# Altium PCB smart-clock-display.PcbDoc
Units mm, origin at the board's own origin, x right, y up, seen from the top; angles counter-clockwise.
Board outline 100 x 50 mm, 4 copper layers (Top Layer, Int1 (GND), Int2 (PWR), Bottom Layer), stack 1.369 mm thick; 19 components, 42 nets, 124 pads, 0 vias.
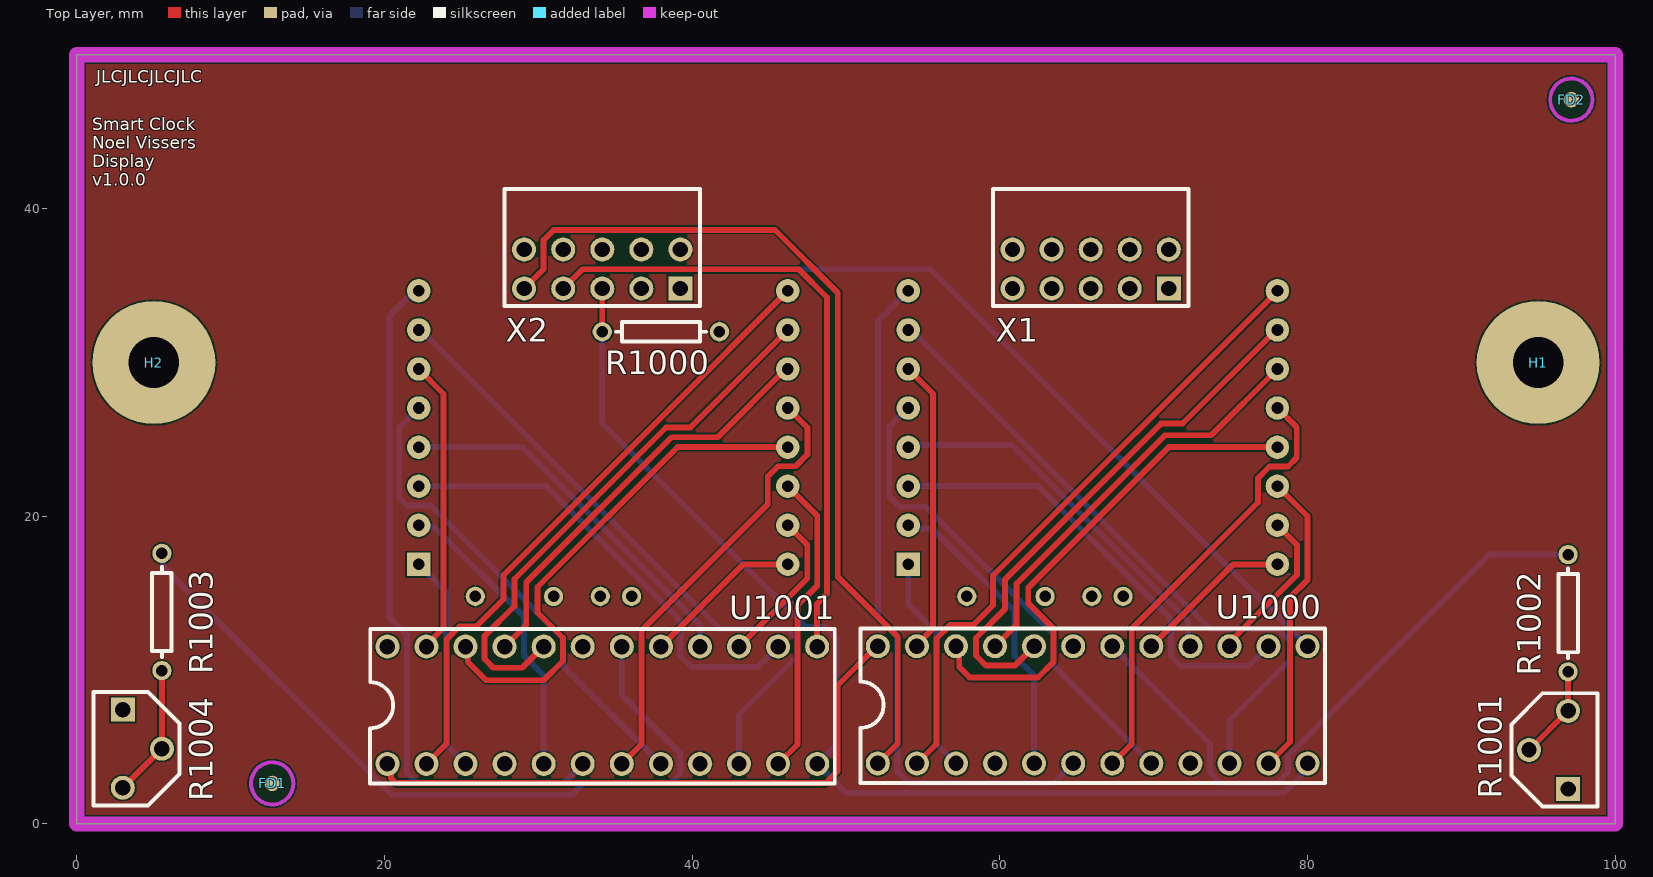
[diagram p0: Top Layer view]
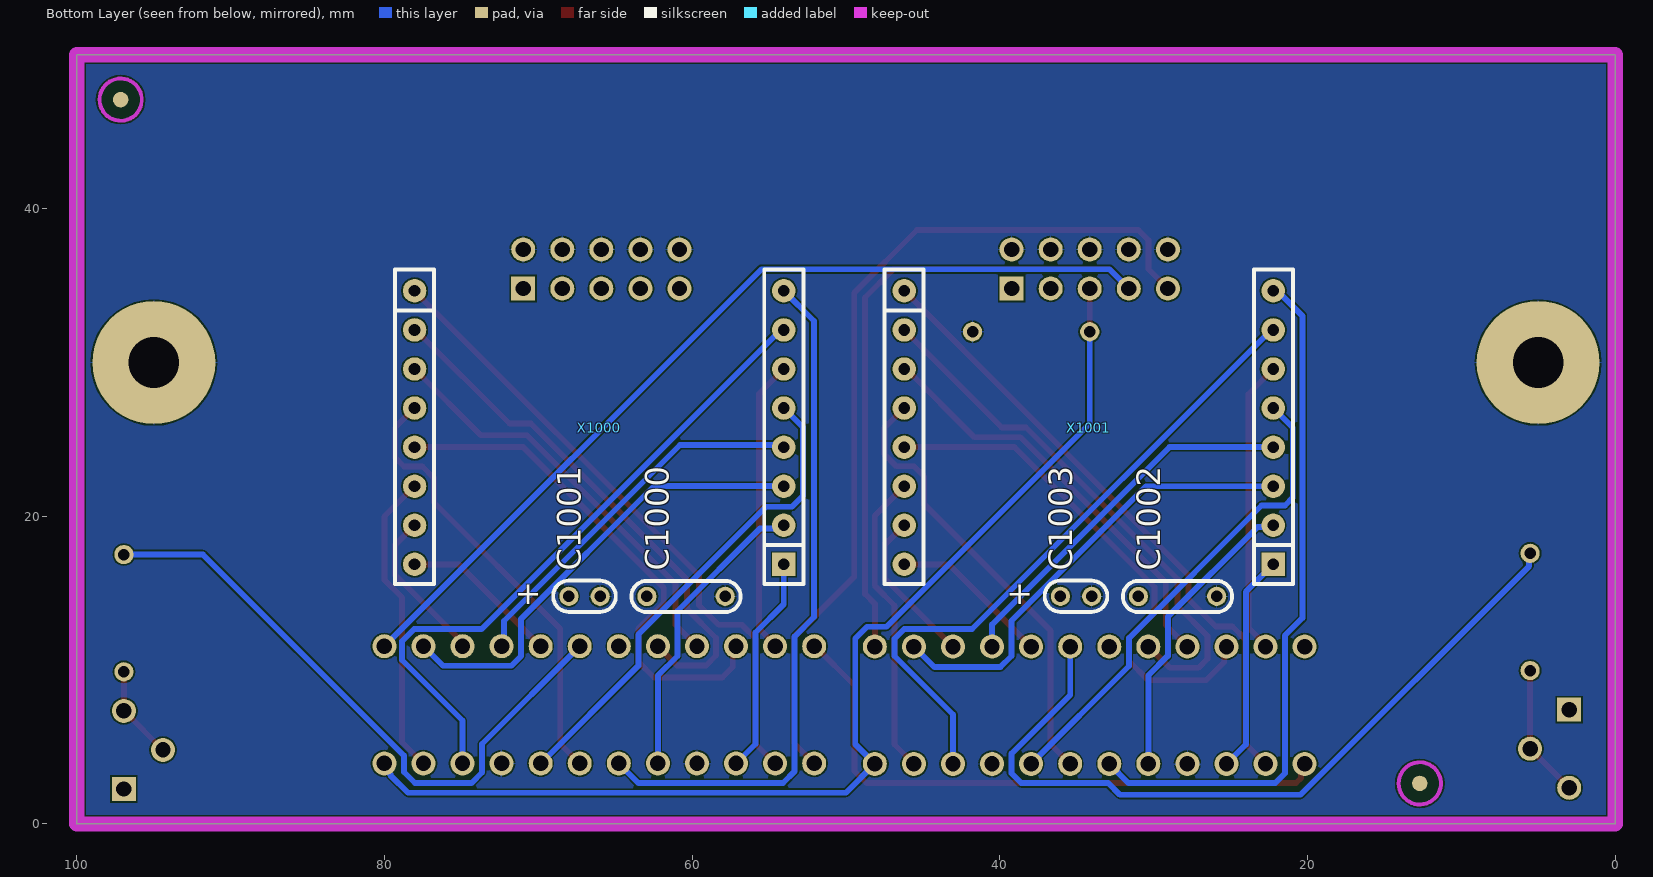
[diagram p1: Bottom Layer view, seen from below]
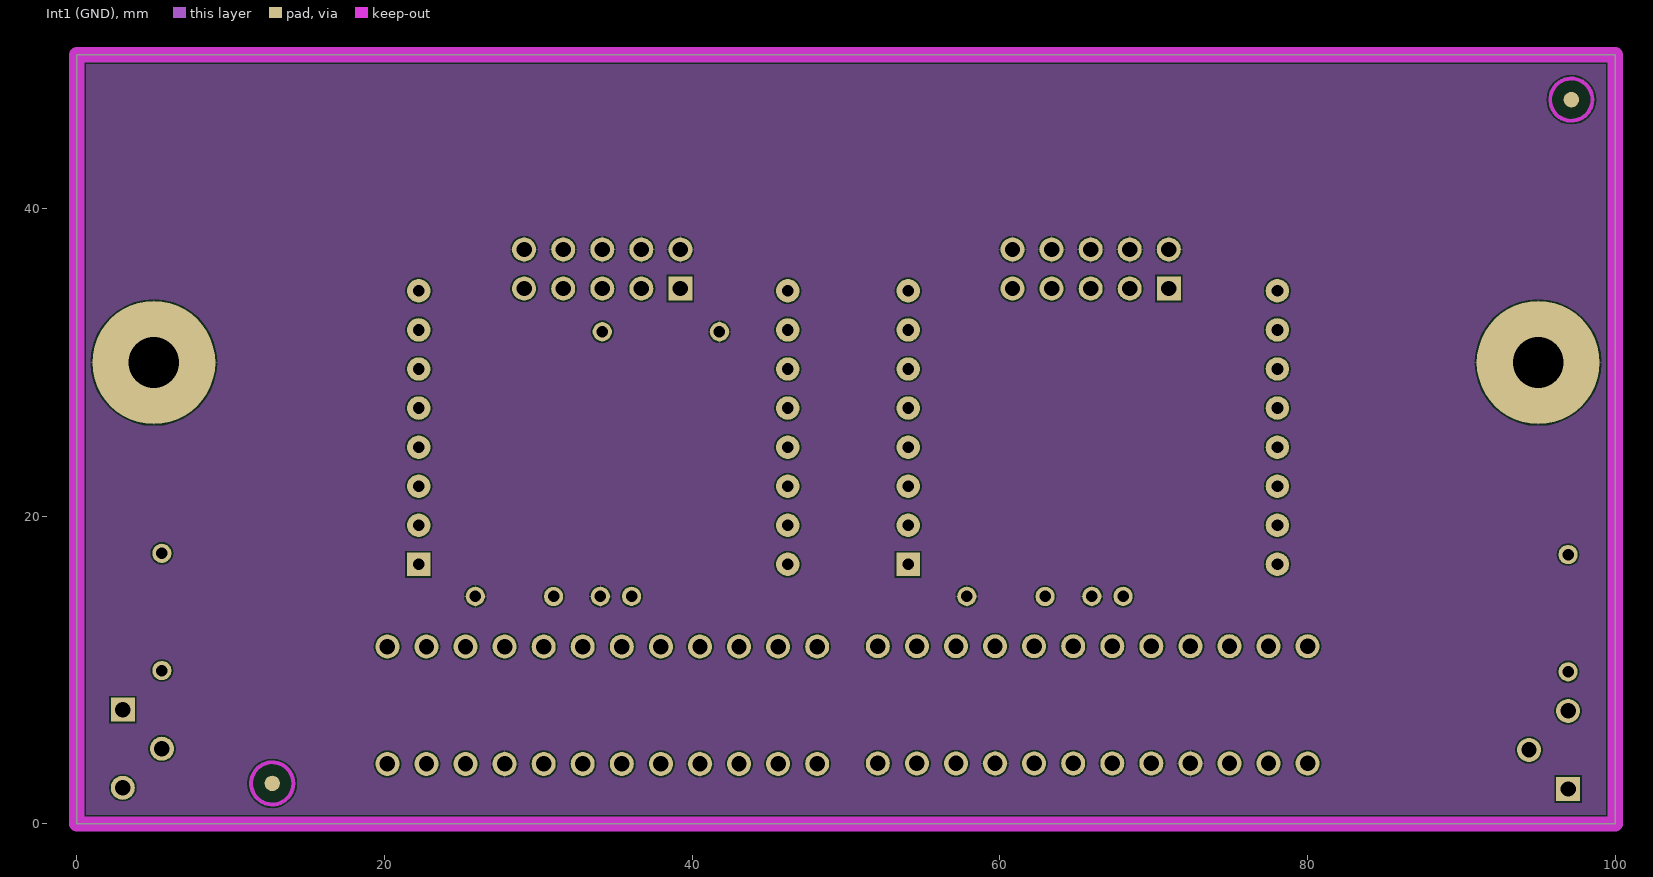
[diagram p2: Int1 (GND)]
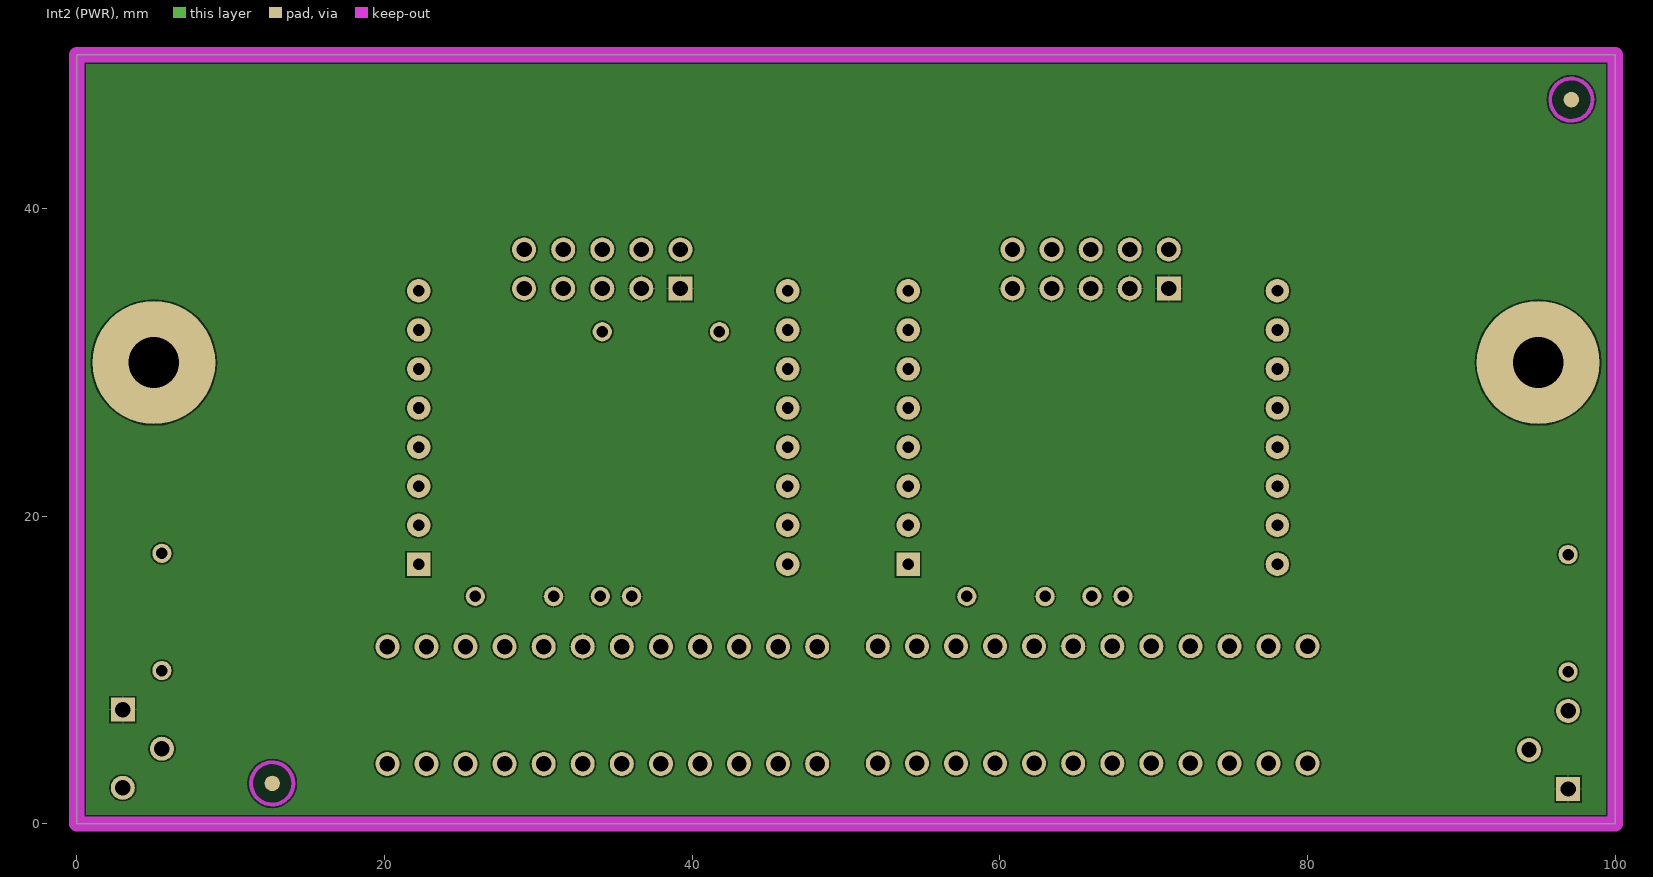
[diagram p3: Int2 (PWR)]
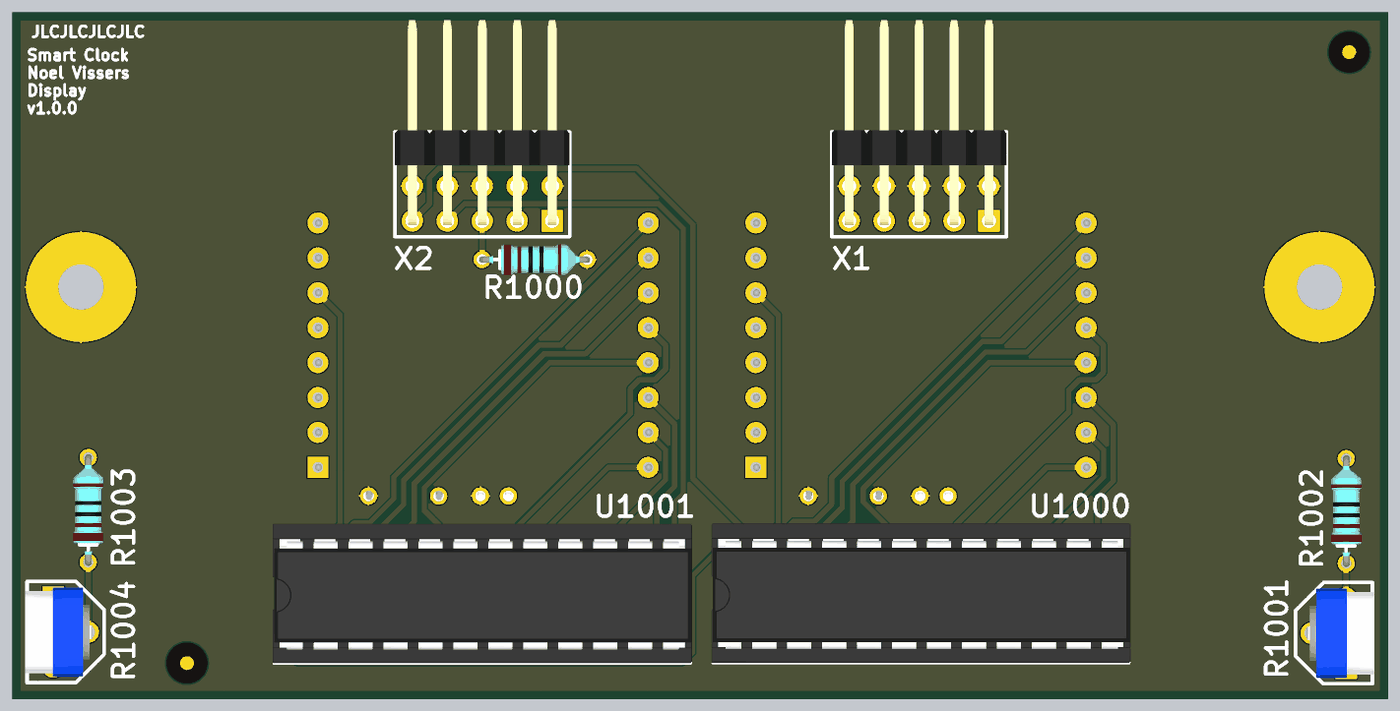
[diagram p4: 3D render of the assembled board from above, using the file's embedded part models]
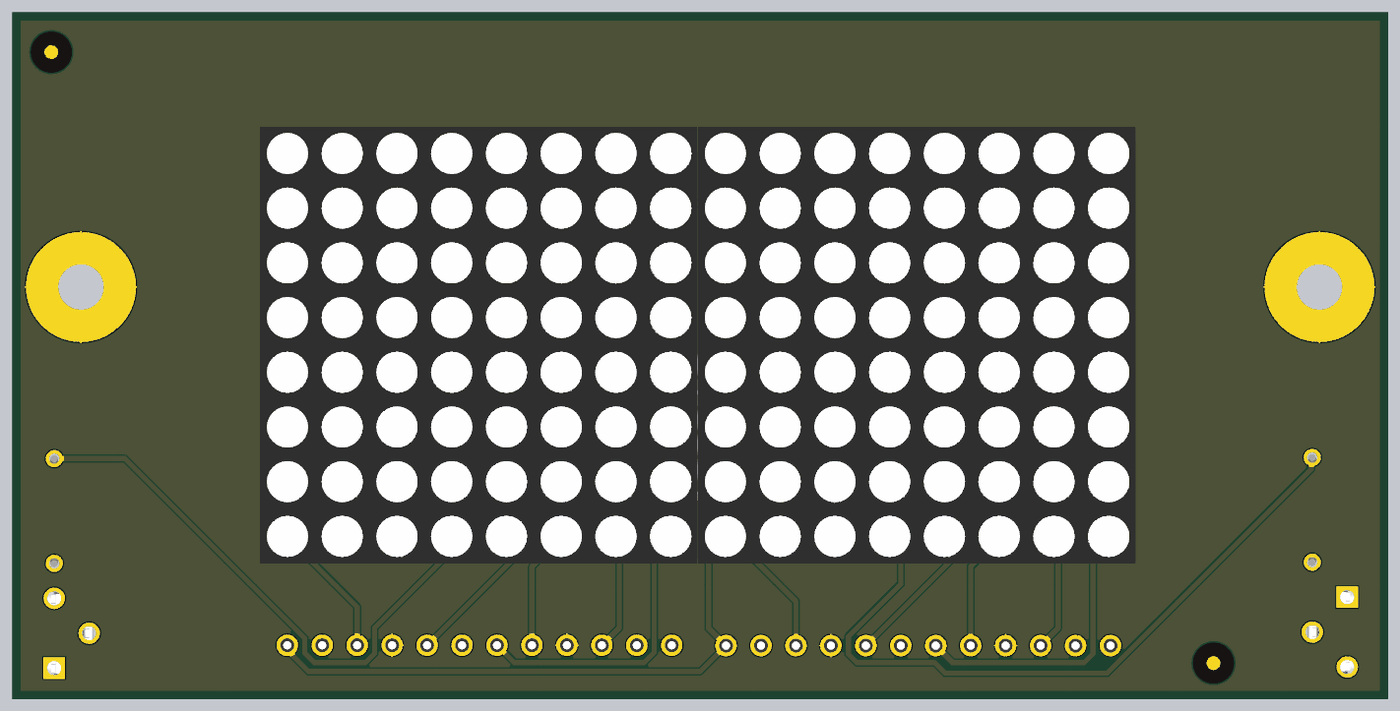
[diagram p5: 3D render of the assembled board from below, using the file's embedded part models]

## Layer stack, top to bottom
Top Solder: solder mask 0.0254, SM-001, Dk 4
Top Layer: signal copper 0.035
Dielectric 1: prepreg 0.1295, PP-017, Dk 4.3
Dielectric 2: prepreg 0.1295, PP-017, Dk 4.3
Int1 (GND): signal copper 0.035
Dielectric 3: core 0.7112, Core-039, Dk 4.8
Int2 (PWR): signal copper 0.035
Dielectric 4: prepreg 0.1295, PP-017, Dk 4.3
Dielectric 5: prepreg 0.1295, PP-017, Dk 4.3
Bottom Layer: signal copper 0.035
Bottom Solder: solder mask 0.0254, SM-001, Dk 4

## Board outline
0,50 100,50 100,0 0,0

## Design rules (kind name [scope] priority, off if disabled: settings)
BoardOutlineClearance [All] p1: gap=0.2 ignorepadtopadclearanceinfootprint=FALSE
Clearance [All] p1: gap=0.102 ignorepadtopadclearanceinfootprint=FALSE except(0.127: Arc-Via Track-Via SMDPad-Via THPad-Via Via-Via Via-Fill Via-Poly Via-Region Via-Text; 0.25: Arc-Hole Track-Hole SMDPad-Hole THPad-Hole Via-Hole Fill-Hole Poly-Hole Region-Hole Text-Hole)
ComponentClearance [All] p1: gap=0.01 collisioncheckmode=3 verticalgap=0.01 showdistances=TRUE
DiffPairsRouting [All] p1: maxlimit=0.102 minlimit=0.102 mostfreqgap=0.102 toplayer_minwidth=0.102 toplayer_maxwidth=1816.048 toplayer_prefwidth=0.102 midlayer1_minwidth=0.102 midlayer1_maxwidth=1816.048 midlayer1_prefwidth=0.102 midlayer2_minwidth=0.102 midlayer2_maxwidth=1816.048 midlayer2_prefwidth=0.102 bottomlayer_minwidth=0.102 bottomlayer_maxwidth=1816.048 bottomlayer_prefwidth=0.102 maxuncoupledlength=12.7
Height [All] p1: minheight=0 maxheight=1816.048 prefheight=12.7
HoleSize [All] p1: absolutevalues=TRUE maxlimit=6.3 minlimit=0.2 maxpercent=80.000 minpercent=20.000
HoleToHoleClearance [All] p1: gap=0.25 allowstackedmicrovias=FALSE
MinimumAnnularRing [All] p1: minimumring=0.076
MinimumSolderMaskSliver [All] p1: minsoldermaskwidth=0
PlaneClearance [All] p1: clearance=0.102
PlaneConnect PlaneConnectPowerPads [InPadClass('PowerPads')] p1: planeconnectstyle=Direct reliefexpansion=0.508 reliefentries=4 reliefconductorwidth=0.254 reliefairgap=0.254
PlaneConnect [All] p2: pad.planeconnectstyle=Relief pad.reliefexpansion=0.3 pad.reliefentries=4 pad.reliefconductorwidth=0.102 pad.reliefairgap=0.102 via.planeconnectstyle=Direct via.reliefexpansion=0.3 via.reliefentries=4 via.reliefconductorwidth=0.127 via.reliefairgap=0.127
PolygonConnect PolygonConnectPowerPads [All vs (InPadClass('PowerPads'))] p1: connectstyle=Direct reliefconductorwidth=0.254 reliefentries=4 polygonreliefangle="90 Angle" airgapwidth=0.254
PolygonConnect [All] p2: thpad.connectstyle=Relief thpad.reliefconductorwidth=0.102 thpad.reliefentries=4 thpad.polygonreliefangle="90 Angle" thpad.airgapwidth=0.102 smdpad.connectstyle=Relief smdpad.reliefconductorwidth=0.102 smdpad.reliefentries=4 smdpad.polygonreliefangle="90 Angle" smdpad.airgapwidth=0.102 via.connectstyle=Direct via.reliefconductorwidth=0.127 via.reliefentries=4 via.polygonreliefangle="90 Angle" via.airgapwidth=0.127
RoutingVias [All] p1: holewidth=0.2 width=0.45 viastyle="Through Hole" minholewidth=0.2 minwidth=0.45 maxholewidth=6.3 maxwidth=6.55
SilkToSilkClearance [All] p1: silktosilkclearance=0
SilkToSolderMaskClearance [IsPad] p1: minsilkscreentomaskgap=0.102 clearancetoexposedcopper=TRUE
SolderMaskExpansion [All] p1: expansion=0.075 istentingtop=FALSE
Width [All] p1: maxlimit=1816.048 minlimit=0.102 preferedwidth=0.102
20 further rules are at their usual default settings.

## Components (designator, comment, footprint, x,y, rotation, side; value= is the part's Value field where it differs from the comment)
C1000 "0.1uF" "TH-CAPACITOR - ANGLE" 62.933,14.8 r180 bottom
C1001 "10uF" "TH-CAPACITOR - POL - ANGLE" 65.727,14.8 r0 bottom
C1002 "0.1uF" "TH-CAPACITOR - ANGLE" 30.98,14.8 r180 bottom
C1003 "10uF" "TH-CAPACITOR - POL - ANGLE" 33.774,14.8 r0 bottom
FD1 "FD" FD 12.7,2.64 r0 top
FD2 "FD" FD 97.155,47.09 r0 top
H1 "SIZE" HOLE#1 95,28.04 r0 top
H2 "SIZE" HOLE#2 5,29 r0 top
R1000 "10k" "AXIAL RESISTOR" 34.155,32 r0 top
R1001 "100k" POTENTIOMETER 96.943,2.275 r90 top
R1002 "10k" "AXIAL RESISTOR" 96.943,9.895 r90 top
R1003 "10k" "AXIAL RESISTOR" 5.525,9.975 r90 top
R1004 "100k" POTENTIOMETER 2.985,7.435 r270 top
U1000 "MAX7219" "DIP-24 WITH SOCKET" 66.04,7.747 r0 top
U1001 "MAX7219" "DIP-24 WITH SOCKET" 34.155,7.72 r0 top
X1 "HEADER-2x5" HEADER-2x5-MALE 60.825,37.35 r0 top
X2 "HEADER-2x5" HEADER-2x5-MALE 29.075,37.35 r0 top
X1000 "1088AS" 1088AS-DOT-MATRIX-8x8 81.983,9.768 r180 bottom
X1001 "1088AS" 1088AS-DOT-MATRIX-8x8 50.157,9.768 r180 bottom

## Footprints (in the part's own frame and the unit in brackets; to place one, negate y for a bottom-side part, rotate by r counter-clockwise, add the part's x,y. Pads: shape width x height; smd on the part's side, far side on the other; paste and mask are expansions set on the pad)
1088AS-DOT-MATRIX-8x8 [mil] "8x8 DOT MATRIX DISPLAY"
  rect 60x60 hole 30: 1(1100,280)
  round 60 hole 30: 2(1100,380) 3(1100,480) 4(1100,580) 5(1100,680) 6(1100,780) 7(1100,880) 8(1100,980) 9(155,980) 10(155,880) 11(155,780) 12(155,680) 13(155,580) 14(155,480) 15(155,380) 16(155,280)
  silkscreen extent 105,230 1150,1035, body extent 0,4 1252,1256, height 397
"AXIAL RESISTOR" [mm] "STANDARD AXIAL RESISTOR"
  round 1.25 hole 0.75: 1(0,0) 2(7.62,0)
  silkscreen extent 0.89,-0.64 6.73,0.64, body extent -0.26,-1.11 7.86,1.09, height 2.28
"DIP-24 WITH SOCKET" [mm] "DIP-24 PACKAGE WITH SOCKET"
  round 1.56 hole 1: 1(-13.97,-3.81) 2(-11.43,-3.81) 3(-8.89,-3.81) 4(-6.35,-3.81) 5(-3.81,-3.81) 6(-1.27,-3.81) 7(1.27,-3.81) 8(3.81,-3.81) 9(6.35,-3.81) 10(8.89,-3.81) 11(11.43,-3.81) 12(13.97,-3.81) 13(13.97,3.81) 14(11.43,3.81) 15(8.89,3.81) 16(6.35,3.81) 17(3.81,3.81) 18(1.27,3.81) 19(-1.27,3.81) 20(-3.81,3.81) 21(-6.35,3.81) 22(-8.89,3.81) 23(-11.43,3.81) 24(-13.97,3.81)
  silkscreen extent -15.1,-5.08 15.11,4.95, body extent -15.24,-5.08 15.24,5.08, height 9.13
FD [mm] "FIDUCIAL MARKER"
  round 1 all layers, no hole mask+1: 1(0,0)
  Keep-Out Layer circle w0.254: c0,0 r1.373
HEADER-2x5-MALE [mm] "2.54mm MALE HEADER - 2x5"
  rect 1.56x1.56 hole 1: 1(10.16,-2.54)
  round 1.56 hole 1: 2(10.16,0) 3(7.62,-2.54) 4(7.62,0) 5(5.08,-2.54) 6(5.08,0) 7(2.54,-2.54) 8(2.54,0) 9(0,-2.54) 10(0,0)
  silkscreen extent -1.27,-3.68 11.43,3.94, body extent -1.27,-2.84 11.44,12.06, height 5.04
HOLE#1 [mm] "M3 SCREW HOLE"
  round 8 hole 3.3: 1(0,1.96)
HOLE#2 [mm] "M3 SCREW HOLE"
  round 8 hole 3.3: 1(0,1)
POTENTIOMETER [mm] "POTENTIOMETER"
  rect 1.56x1.56 hole 1: 1(0,0)
  round 1.56 hole 1: 2(2.54,2.54) 3(5.08,0)
  silkscreen extent -1.14,-1.91 6.22,3.68, body extent -0.71,-2.03 5.79,2.84, height 8.34
"TH-CAPACITOR - ANGLE" [mm] "TH-CAPACITOR - ANGLE"
  round 1.25 hole 0.75: 1(-0.009,-0.008) 2(5.08,0)
  silkscreen extent -1.02,-1.02 6.08,1.01, body extent -0.76,-0.32 5.73,6.67, height 2.64
"TH-CAPACITOR - POL - ANGLE" [mm] "TH-CAPACITOR - POL - ANGLE"
  round 1.25 hole 0.75: 1(0.254,0) 2(2.286,0)
  silkscreen extent -0.76,-1.03 3.31,1.01, body extent -1.23,-8.4 3.77,0.25, height 5.09

## Part data
C1000 C1002: library part CAPACITOR, "GENERIC CAPACITOR"
C1001 C1003: library part "CAPACITOR POL", "POLARIZED CAPACITOR"
FD1 FD2: "FIDUCIAL MARKER"
H1 H2: library part MOUNTING-HOLE, "M3 MOUNTING HOLE WITH SCREW AND SPACER"
R1000 R1002 R1003: library part RESISTOR, "GENERIC RESISTOR"
R1001 R1004: library part POTMETER, "POTMETER"
U1000 U1001: "IC DRVR 7 SEGMNT 8 DIGIT 24SOIC", Package="DIP-24 Maxim Integrated", Digi-Key_Part_Number=MAX7219CWG+TCT-ND, Digi-Key_Purchase_URL=https://www.digikey.com/product-detail/en/maxim-integrated/MAX7219CWG-T/MAX7219CWG-TCT-ND/4146791?utm_source=snapeda&utm_medium=aggregator&utm_campaign=symbol, MF="Maxim Integrated", MP=MAX7219, SnapEDA_Link=https://www.snapeda.com/parts/MAX7219/Maxim%20Integrated/view-part/481049/?ref=snap
X1 X2: "2.54mm HEADER 2x5", System=Connector
X1000 X1001: library part 1088AS-DOT-MATRIX, "8x8 DOT MATRIX LED DISPLAY"

## Nets (pads, with @x,y where several pads share a name; then routed paths per layer and width w, separated by ;. In a path a pad name is that pad's centre, name@x,y a point inside that pad or via, vN(x,y) a via of type N, cw(c..) or ccw(c..) an arc to the next point about the centre after c; other vN are vias at no path point)
5V_VCC: C1000.1 C1001.2 C1002.1 C1003.2 R1001.1 R1004.1 U1000.19 U1001.19 X1.1 X1.3 X1.5 X1.7 X1.9 X2.1 X2.3 | length 0.3
  Bottom Layer w0.254: X1.3@68.204,34.569 X1.3
CS: R1000.1 U1000.12 U1001.12 X2.5 | length 72.2
  Top Layer w0.381: R1000.1 X2.5
  Bottom Layer w0.381: R1000.1@34.155,32.011 34.155,26.043 47.371,12.827 48.641,12.827 49.403,12.065 49.403,5.188 U1001.12 50.003,2.032 78.48,2.032 79.623,3.175 79.623,3.231 80.01,3.618 U1000.12
DATA_OUT: U1000.24 U1001.1 | length 39.7
  Top Layer w0.381: U1001.1 20.411,3.684 20.411,2.997 20.741,2.667 48.67,2.667 49.441,3.438 49.441,8.997 52.001,11.557 U1000.24
GND: C1000.2 C1001.1 C1002.2 C1003.1 H1.1 H2.1 R1000.2 U1000.4 U1000.9 U1001.4 U1001.9 X1.2 X1.4 X1.6 X1.8 X1.10 X2.2 X2.4 X2.6 X2.8 X2.10
MOSI: U1000.1 X2.9 | length 57.7
  Top Layer w0.381: X2.9 30.328,36.063 30.328,37.955 30.994,38.622 45.378,38.622 49.466,34.534 49.466,16.066 53.365,12.167 53.365,5.232 U1000.1 ; U1000.1@52.57,3.91 U1000.1@52.57,4.118
NetR1001_2: R1001.2 R1001.3 R1002.1 | length 6.1
  Top Layer w0.381: R1001.2 R1001.3 R1002.1
NetR1002_2: R1002.2 U1000.18 | length 41.2
  Bottom Layer w0.381: U1000.18 73.66,5.207 73.66,3.346 74.339,2.667 78.021,2.667 78.74,3.386 78.74,4.445 91.81,17.515 R1002.2
NetR1003_1: R1003.1 R1004.2 R1004.3 | length 8.7
  Top Layer w0.381: R1004.3 R1004.2 R1003.1
NetR1003_2: R1003.2 U1001.18 | length 51.1
  Bottom Layer w0.381: R1003.2 5.588,17.532 5.588,16.764 20.447,1.905 32.194,1.905 32.956,2.667 38.608,2.667 39.243,3.302 39.243,4.572 35.425,8.39 U1001.18
NetU1000_2: U1000.2 X1000.9 | length 41.3
  Top Layer w0.381: U1000.2 55.88,5.207 55.88,12.065 56.769,12.954 58.293,12.954 59.563,14.224 59.563,16.153 78.046,34.636 X1000.9
NetU1000_3: U1000.3 X1000.1 | length 14.2
  Bottom Layer w0.381: X1000.1 54.043,14.283 55.88,12.446 55.88,5.207 U1000.3
NetU1000_5: U1000.5 X1000.2 | length 19.7
  Bottom Layer w0.381: X1000.2 54.262,19.201 55.602,19.201 60.96,13.843 60.96,10.922 62.23,9.652 U1000.5
NetU1000_6: U1000.6 X1000.8 | length 44.8
  Bottom Layer w0.381: X1000.8 52.08,32.697 52.08,13.452 53.34,12.192 53.34,3.429 54.102,2.667 63.5,2.667 U1000.6
NetU1000_7: U1000.7 X1000.12 | length 29.3
  Top Layer w0.381: U1000.7 68.58,5.207 68.58,12.7 76.778,20.898 76.778,22.486 77.533,23.241 78.74,23.241 79.3,23.801 79.3,25.787 X1000.12
NetU1000_8: U1000.8 X1000.5 | length 31.7
  Bottom Layer w0.381: X1000.5 52.802,25.799 52.802,21.335 53.515,20.622 55.197,20.622 63.5,12.319 63.5,10.287 U1000.8
NetU1000_10: U1000.10 X1000.7 | length 42.8
  Bottom Layer w0.381: X1000.7 54.246,32.12 73.686,12.68 78.068,12.68 78.867,11.881 78.867,10.668 74.93,6.731 U1000.10
NetU1000_11: U1000.11 X1000.14 | length 19.9
  Top Layer w0.381: U1000.11 78.867,5.334 78.867,14.732 80.01,15.875 80.01,19.996 X1000.14
NetU1000_14: U1000.14 X1000.3 | length 30.2
  Bottom Layer w0.381: X1000.3 54.054,21.971 62.484,21.971 71.12,13.335 71.12,10.922 71.75,10.292 76.205,10.292 U1000.14
NetU1000_15: U1000.15 X1000.15 | length 10.2
  Top Layer w0.381: U1000.15 74.93,11.811 79.311,16.192 79.311,18.156 X1000.15
NetU1000_16: U1000.16 X1000.4 | length 24.7
  Bottom Layer w0.381: X1000.4 54.181,24.638 60.785,24.638 72.229,13.194 72.229,11.718 U1000.16
NetU1000_17: U1000.17 X1000.16 | length 10.4
  Top Layer w0.381: U1000.17 75.173,16.88 X1000.16
NetU1000_20: U1000.20 X1000.10 | length 34.7
  Top Layer w0.381: U1000.20 60.969,10.296 59.099,10.296 58.445,10.95 58.445,12.09 60.325,13.97 60.325,15.875 70.485,26.035 71.882,26.035 77.967,32.12 X1000.10
NetU1000_21: U1000.21 X1000.11 | length 27.4
  Top Layer w0.381: U1000.21 61.087,12.954 61.087,15.621 70.739,25.273 73.739,25.273 X1000.11
NetU1000_22: U1000.22 X1000.13 | length 33.8
  Top Layer w0.381: U1000.22 57.359,11.348 57.359,10.205 58.039,9.525 62.484,9.525 63.5,10.541 63.5,12.7 61.849,14.351 61.849,15.367 70.982,24.5 X1000.13
NetU1000_23: U1000.23 X1000.6 | length 19.1
  Top Layer w0.381: X1000.6 55.667,27.956 55.667,12.72 54.61,11.663 U1000.23
NetU1001_2: U1001.2 X1001.9 | length 41.1
  Top Layer w0.381: U1001.2 24.044,5.229 24.044,12.013 24.871,12.84 25.962,12.84 27.737,14.615 27.737,16.18 38.52,26.963 38.523,26.963 X1001.9
NetU1001_3: U1001.3 X1001.1 | length 14.2
  Bottom Layer w0.381: X1001.1 24.003,15.094 24.003,5.172 U1001.3
NetU1001_5: U1001.5 X1001.2 | length 19.4
  Bottom Layer w0.381: X1001.2 22.333,19.304 23.241,19.304 29.075,13.47 29.075,10.93 30.345,9.66 U1001.5
NetU1001_6: U1001.6 X1001.8 | length 45
  Bottom Layer w0.381: X1001.8 21.96,34.66 20.332,33.032 20.332,13.393 21.463,12.262 21.463,3.302 22.098,2.667 31.642,2.667 U1001.6
NetU1001_7: U1001.7 X1001.12 | length 29.3
  Top Layer w0.381: U1001.7 36.717,5.202 36.717,12.587 44.913,20.783 44.913,22.589 45.579,23.255 46.724,23.255 47.487,24.018 47.487,25.773 X1001.12
NetU1001_8: U1001.8 X1001.5 | length 31.6
  Bottom Layer w0.381: X1001.5 20.958,25.781 20.958,21.206 21.463,20.701 22.991,20.701 31.608,12.083 31.608,10.267 U1001.8
NetU1001_10: U1001.10 X1001.7 | length 42.7
  Bottom Layer w0.381: X1001.7 22.363,32.12 41.804,12.679 46.211,12.679 46.847,12.044 46.847,10.924 43.045,7.123 U1001.10
NetU1001_11: U1001.11 X1001.14 | length 19.9
  Top Layer w0.381: U1001.11 46.849,5.174 46.849,14.21 48.133,15.494 48.133,20.047 X1001.14
NetU1001_14: U1001.14 X1001.3 | length 30.1
  Bottom Layer w0.381: X1001.3 30.491,21.96 39.243,13.208 39.243,10.922 39.963,10.202 44.257,10.202 U1001.14
NetU1001_15: U1001.15 X1001.15 | length 10.2
  Top Layer w0.381: U1001.15 47.477,15.962 47.477,18.163 X1001.15
NetU1001_16: U1001.16 X1001.4 | length 24.5
  Bottom Layer w0.381: X1001.4 28.967,24.5 40.505,12.962 U1001.16
NetU1001_17: U1001.17 X1001.16 | length 10.5
  Top Layer w0.381: U1001.17 43.315,16.88 X1001.16
NetU1001_20: U1001.20 X1001.10 | length 35.1
  Top Layer w0.381: U1001.20 30.315,11.53 28.947,10.161 27.075,10.161 26.51,10.725 26.51,12.231 28.445,14.165 28.445,15.93 38.296,25.781 39.881,25.781 X1001.10
NetU1001_21: U1001.21 X1001.11 | length 27.5
  Top Layer w0.381: U1001.21 29.215,12.94 29.215,15.709 38.652,25.146 41.656,25.146 46.09,29.58 X1001.11
NetU1001_22: U1001.22 X1001.13 | length 33.8
  Top Layer w0.381: U1001.22 25.414,11.381 25.414,10.53 26.594,9.35 30.358,9.35 31.604,10.596 31.604,12.098 29.946,13.756 29.946,15.404 39.042,24.5 X1001.13
NetU1001_23: U1001.23 X1001.6 | length 19.2
  Top Layer w0.381: X1001.6 23.838,27.959 23.838,12.76 22.725,11.647 U1001.23
SCK: U1000.13 U1001.13 X2.7 | length 100.5
  Top Layer w0.381: X2.7 32.868,36.063 46.937,36.063 48.768,34.232 48.768,14.962 48.125,14.319 U1001.13
  Bottom Layer w0.381: X2.7 32.873,36.068 55.499,36.068 U1000.13
pads on no net: FD1.1 FD2.1 U1001.24

## Polygon pours and split planes (outlines as drawn)
GND on Int1 (GND) "GND_L02_P000" (solid, remove dead copper, pour order 0): 0,50 100,50 100,0 0,0
GND on Int1 (GND) "GND_L02_P001" (solid, remove dead copper, pour order 1): 115,5
5V_VCC on Int2 (PWR) "5V_VCC_L03_P002" (solid, remove dead copper, pour order 2): 0,50 100,50 100,0 0,0
GND on Bottom Layer "GND_L04_P005" (solid, pour order 5): 0,50 100,50 100,0 0,0
GND on Top Layer "GND_L01_P006" (solid, pour order 6): 0,50 100,50 100,0 0,0

## Keep-outs
Keep-Out Layer:
  the board outline again, w1

## Silkscreen, mask and mechanical layers (free items; w line width, h text height)
Top Overlay:
  text "JLCJLCJLCJLC" at 1.247,48.194 h0.8
  text "Smart Clock / Noel Vissers / Display / v1.0.0" at 1,41.5 h0.8
Mechanical 1:
  the board outline again, w1
  text ".Pcb_File_Name_No_Path" at 0.254,51.862 h1.52

## Dimensions
0,0 to 0,50 on Dimensions
100,50 to 0,50 on Dimensions

## Text inside footprints (layer, text, board x,y; h text height)
C1001: Bottom Overlay "+" at 69.791,15.562 h1.52 r180
C1003: Bottom Overlay "+" at 37.838,15.562 h1.52 r180